# EAGLE board SRAMShield (EAGLE 7.5.0)
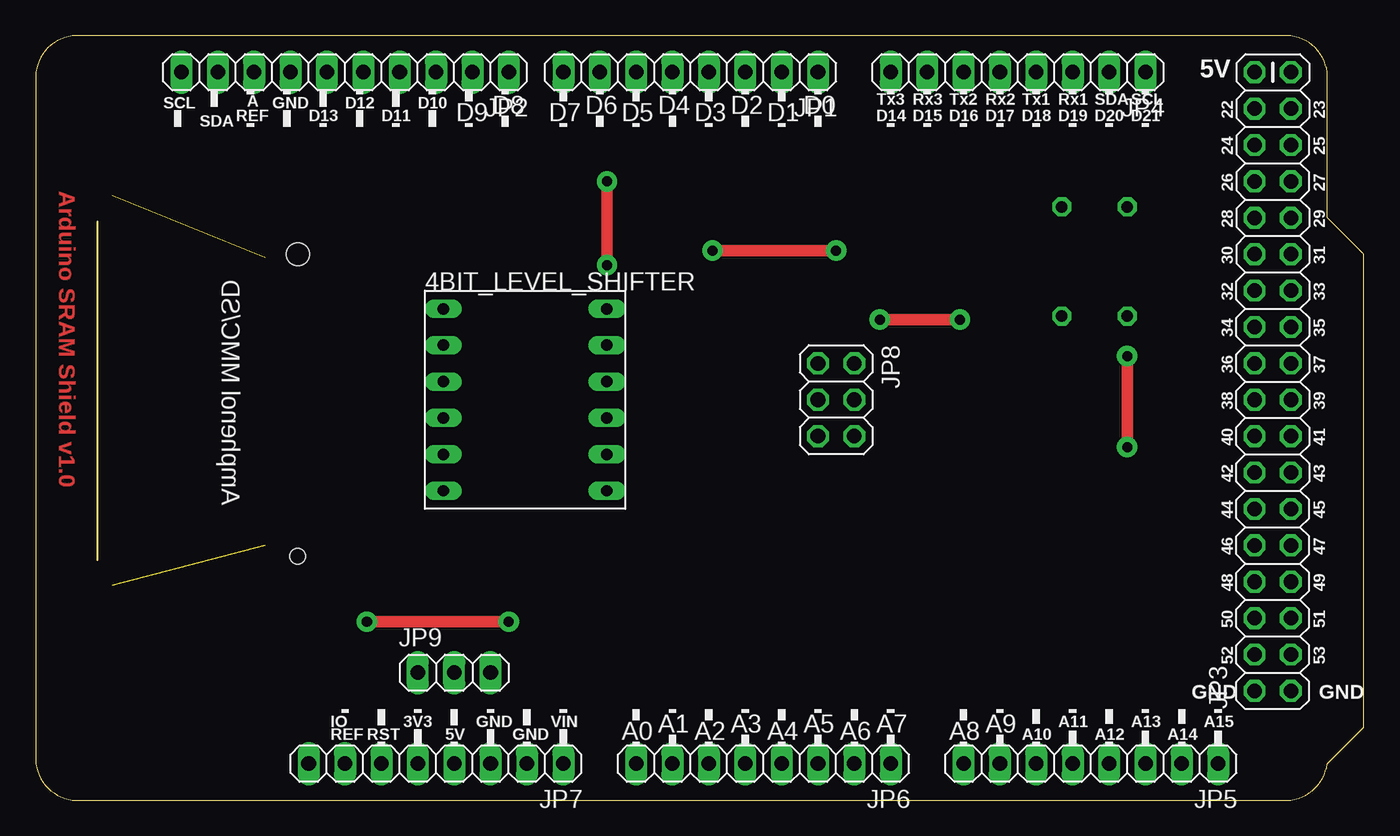
[diagram p0: board, top side]
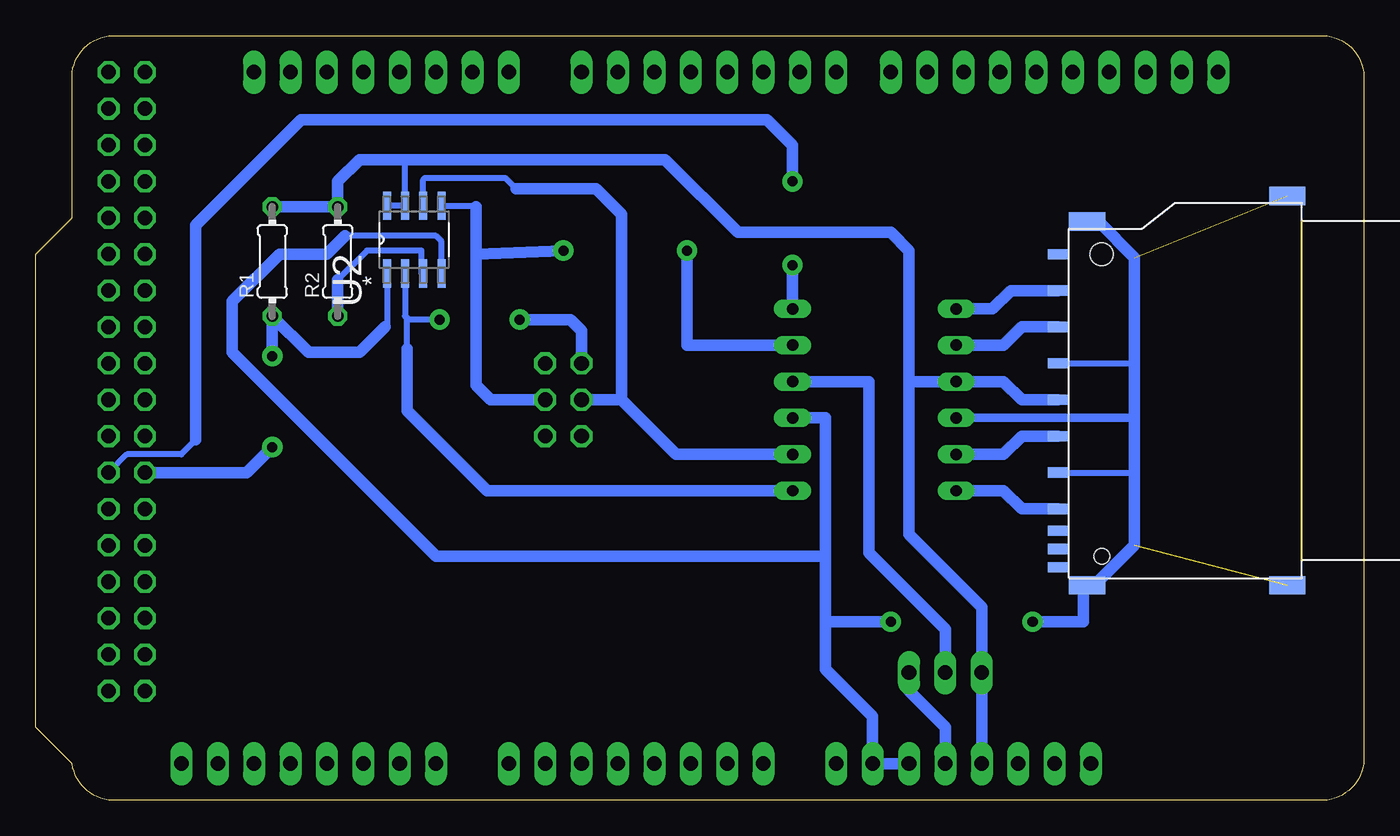
[diagram p1: board, bottom side, seen from below]

Size 92.71 x 53.34 mm. Coordinates in mm from the lower left corner, seen from the top.
Outline: 0,2.54 arc74 2.54,0 87.63,0 arc74 90.17,2.54 92.71,5.08 92.71,38.1 90.17,40.64 90.17,50.8 arc74 87.63,53.34 2.54,53.34 arc74 0,50.8 0,2.54
Copper layers (1*16): Top 0.035mm / dielectric 1.5mm / Bottom 0.035mm
Design rules "default *": minimum track width 10mil, minimum drill 24mil, track to track 12mil, track to pad 12mil, pad to pad 12mil, via to via 12mil, smd to smd 8mil, copper to edge 18mil, drill to drill 8mil, minimum pad ring 10mil, minimum via ring 8mil, stop-mask expansion 4mil, vias tented up to drill 0mil, thermal gap 10mil

## Footprints (pad centres in the part's own frame; a part is rotated, then mirrored left to right if it is on the bottom)
THT12 = drill 0.8 long: 1 -5.08,-1.27; 2 -5.08,-3.81; 3 -5.08,-6.35; 4 -5.08,-8.89; 5 -5.08,-11.43; 6 -5.08,-13.97; 7 6.35,-13.97; 8 6.35,-11.43; 9 6.35,-8.89; 10 6.35,-6.35; 11 6.35,-3.81; 12 6.35,-1.27
SDCMF-10915W010 = smd 0.711 x 1.422: 1 7.366,13.462; 2 4.826,13.462; 3 2.286,13.462; 4 -0.254,13.462; 5 -2.794,13.462; 6 -5.334,13.462; 7 -7.874,13.462; 8 -9.398,13.462; 9 9.906,13.462; 10 -11.938,13.462; 11 -10.668,13.462 | smd 1.27 x 2.54: M1 12.192,11.43; M2 13.97,-2.54; M3 -13.208,-2.54; M4 -13.208,11.43 | hole 1.6: 9.906,10.414 | hole 1.1: -11.176,10.414
1X08 = drill 1.016 long: 1 -8.89,0; 2 -6.35,0; 3 -3.81,0; 4 -1.27,0; 5 1.27,0; 6 3.81,0; 7 6.35,0; 8 8.89,0
1X10 = drill 1.016 long: 1 -11.43,0; 2 -8.89,0; 3 -6.35,0; 4 -3.81,0; 5 -1.27,0; 6 1.27,0; 7 3.81,0; 8 6.35,0; 9 8.89,0; 10 11.43,0
2X18 = drill 1.016 octagon: 1 -21.59,-1.27; 2 -21.59,1.27; 3 -19.05,-1.27; 4 -19.05,1.27; 5 -16.51,-1.27; 6 -16.51,1.27; 7 -13.97,-1.27; 8 -13.97,1.27; 9 -11.43,-1.27; 10 -11.43,1.27; 11 -8.89,-1.27; 12 -8.89,1.27; 13 -6.35,-1.27; 14 -6.35,1.27; 15 -3.81,-1.27; 16 -3.81,1.27; 17 -1.27,-1.27; 18 -1.27,1.27; 19 1.27,-1.27; 20 1.27,1.27; 21 3.81,-1.27; 22 3.81,1.27; 23 6.35,-1.27; 24 6.35,1.27; 25 8.89,-1.27; 26 8.89,1.27; 27 11.43,-1.27; 28 11.43,1.27; 29 13.97,-1.27; 30 13.97,1.27; 31 16.51,-1.27; 32 16.51,1.27; 33 19.05,-1.27; 34 19.05,1.27; 35 21.59,-1.27; 36 21.59,1.27
2X03 = drill 1.016 octagon: 1 -2.54,-1.27; 2 -2.54,1.27; 3 0,-1.27; 4 0,1.27; 5 2.54,-1.27; 6 2.54,1.27
1X03 = drill 1.016 long: 1 -2.54,0; 2 0,0; 3 2.54,0
0204/7 = drill 0.813 octagon: 1 -3.81,0; 2 3.81,0
SOIC127P600X175-8N = smd 1.981 x 0.559: 1 -2.362,1.905; 2 -2.362,0.635; 3 -2.362,-0.635; 4 -2.362,-1.905; 5 2.362,-1.905; 6 2.362,-0.635; 7 2.362,0.635; 8 2.362,1.905

## Placement (x,y rotation side)
4BIT_LEVEL_SHIFTER  4BIT_LEVEL_SHIFTER  [THT12]  33.53,35.56 0 top
J1  SD_SLOT  [SDCMF-10915W010]  7.87,28.19 90 bottom
JP1  Digital_0_7  [1X08]  45.72,50.8 180 top
JP2  Digital_8_13  [1X10]  21.59,50.8 180 top
JP3  Digital_22_53_5V_GND  [2X18]  86.36,29.21 90 top
JP4  Digital_14_21  [1X08]  68.58,50.8 180 top
JP5  Analog_8_15  [1X08]  73.66,2.54 180 top
JP6  Analog_0_8  [1X08]  50.8,2.54 180 top
JP7  POWER  [1X08]  27.94,2.54 180 top
JP8  ICSP  [2X03]  55.88,27.94 270 top
JP9  [1X03]  29.21,8.89 0 top
R1  10k  [0204/7]  76.2,37.59 90 bottom
R2  10k  [0204/7]  71.63,37.59 90 bottom
U2  23LC1024-I/SN  [SOIC127P600X175-8N]  66.29,39.12 90 bottom

## Library data of the parts
4BIT_LEVEL_SHIFTER = levelShifter
J1 = sd-mmc
JP1-JP9 = pinhead
R1 R2 = rcl
U2 = microchip_23LC1024; MPN: 23LC1024-I/SN; OC_FARNELL: 2212150; OC_NEWARK: 94T8231; PACKAGE: SOIC-8; SUPPLIER: MICROCHIP

## Nets
+3V3: 4BIT_LEVEL_SHIFTER.3 J1.4 JP7.5 JP9.1 R1.2 R2.2 U2.7 U2.8
+5V: JP7.4 JP9.3
GND: 4BIT_LEVEL_SHIFTER.4 4BIT_LEVEL_SHIFTER.9 J1.3 J1.6 J1.M1 J1.M2 J1.M3 J1.M4 JP7.2 JP7.3 U2.4
INPUT_LOGIC_VOLTAGE: 4BIT_LEVEL_SHIFTER.10 JP9.2
MISO_ARD: 4BIT_LEVEL_SHIFTER.7 JP8.1 U2.2
MOSI_ARD: 4BIT_LEVEL_SHIFTER.11 JP8.4 U2.5
N$2: 4BIT_LEVEL_SHIFTER.1 J1.1
N$4: 4BIT_LEVEL_SHIFTER.2 J1.2
N$5: 4BIT_LEVEL_SHIFTER.5 J1.5
N$6: 4BIT_LEVEL_SHIFTER.6 J1.7
N$9: R2.1 U2.3
SCK_ARD: 4BIT_LEVEL_SHIFTER.8 JP8.3 U2.6
SD_SS: 4BIT_LEVEL_SHIFTER.12 JP3.13
SRAM_SS: JP3.14 R1.1 U2.1

## Tracks (layer width: path | path; a pad name or v marks a point on that pad's centre or on a via)
+3V3
  Bottom 0.406: 67.06,44.7 66.93,44.58 U2.7 U2.8
  Bottom 0.813: J1.4 23.88,27.94 25.15,29.21 4BIT_LEVEL_SHIFTER.3 31.75,29.21 | R1.2 R2.2 71.63,43.18 70.1,44.7 67.06,44.7 48.77,44.7 43.69,39.62 33.02,39.62 31.75,38.35 31.75,29.21 | 31.75,29.21 31.75,18.54 26.67,13.46 JP9.1 JP7.5
+5V
  Bottom 0.813: JP9.3 31.75,7.62 29.21,5.08 JP7.4
GND  (via drill 0.7 pad 1.42)  (3 unrouted)
  Top 0.813: v23.11,12.45 v33.02,12.45
  Bottom 0.406: J1.3 16,30.48 | J1.6 16,22.86 | U2.4 64.39,38.99 64.77,39.37 71.12,39.37
  Bottom 0.61: 4BIT_LEVEL_SHIFTER.4 16,26.67
  Bottom 0.813: JP7.3 JP7.2 34.29,5.84 37.59,9.14 37.59,12.45 | 4BIT_LEVEL_SHIFTER.9 37.59,26.67 37.59,17.02 | 37.59,17.02 37.59,12.45 | v23.11,12.45 19.56,12.45 19.56,14.99 J1.M4 18.8,14.99 16,17.78 16,22.86 | v33.02,12.45 37.59,12.45 | 71.12,39.37 72.39,38.1 75.69,38.1 78.99,34.8 78.99,31.24 64.77,17.02 37.59,17.02 | J1.M1 18.54,40.39 16,37.85 16,30.48 16,26.67 | 16,22.86 16,26.67 | 16,26.67 16,22.86
INPUT_LOGIC_VOLTAGE
  Bottom 0.813: 4BIT_LEVEL_SHIFTER.10 34.54,29.21 34.54,17.27 29.21,11.94 JP9.2
MISO_ARD  (via drill 0.7 pad 1.42)
  Top 0.813: v58.93,33.53 v64.52,33.53
  Bottom 0.406: v64.52,33.53 66.67,33.53 66.8,33.66 | U2.2 66.93,33.78 66.8,33.66 | 66.8,31.5 66.8,33.66
  Bottom 0.813: JP8.1 54.61,32.77 55.37,33.53 v58.93,33.53 | 4BIT_LEVEL_SHIFTER.7 61.21,21.59 66.8,27.18 66.8,31.5
MOSI_ARD  (via drill 0.7 pad 1.42)
  Top 0.813: v47.24,38.35 v55.88,38.35
  Bottom 0.406: U2.5 62.05,41.48 61.98,41.4
  Bottom 0.813: 61.98,41.4 61.98,38.1 | 61.98,38.1 61.98,28.96 60.96,27.94 JP8.4 | 4BIT_LEVEL_SHIFTER.11 47.24,31.75 v47.24,38.35 | v55.88,38.35 61.98,38.1
N$2
  Bottom 0.813: J1.1 24.64,35.56 25.91,34.29 4BIT_LEVEL_SHIFTER.1
N$4
  Bottom 0.813: J1.2 23.88,33.02 25.15,31.75 4BIT_LEVEL_SHIFTER.2
N$5
  Bottom 0.813: J1.5 23.88,25.4 25.15,24.13 4BIT_LEVEL_SHIFTER.5
N$6
  Bottom 0.813: 4BIT_LEVEL_SHIFTER.6 25.15,21.59 23.88,20.32 J1.7
N$9
  Bottom 0.406: U2.3 65.79,36.75 65.79,38.35 69.6,38.35 71.63,36.32
  Bottom 0.813: 71.63,36.32 R2.1
SCK_ARD
  Bottom 0.406: U2.6 65.66,43.31 65.53,43.43 59.94,43.43 59.18,42.67
  Bottom 0.813: 4BIT_LEVEL_SHIFTER.8 48.01,24.13 51.82,27.94 | JP8.3 51.82,27.94 | 59.18,42.67 53.59,42.67 51.82,40.89 51.82,27.94
SD_SS  (via drill 0.7 pad 1.42)
  Top 0.813: v39.88,37.34 v39.88,43.18
  Bottom 0.406: 81.53,25.15 82.55,24.13 86.36,24.13 JP3.13
  Bottom 0.813: 4BIT_LEVEL_SHIFTER.12 v39.88,37.34 | v39.88,43.18 39.88,45.72 41.66,47.5 74.17,47.5 81.53,40.13 81.53,25.15
SRAM_SS  (via drill 0.7 pad 1.42)
  Top 0.813: v76.2,30.99 v76.2,24.64
  Bottom 0.406: U2.1 68.2,33.15 68.33,33.02
  Bottom 0.813: 68.33,33.02 70.1,31.24 73.66,31.24 R1.1 v76.2,30.99 | v76.2,24.64 77.98,22.86 JP3.14

## Text on the board
Top: Arduino SRAM Shield v1.0
tPlace: 5V | Tx3 | Rx3 | Tx2 | Rx2 | Tx1 | Rx1 | SDA | SCL | SCL | A | GND | D12 | D10 | D8 | D6 | D4 | D2 | D0 | 22 | 23 | SDA | REF | D13 | D11 | D9 | D7 | D5 | D3 | D1 | D14 | D15 | D16 | D17 | D18 | D19 | D20 | D21 | 24 | 25 | 26 | 27 | 28 | 29 | 30 | 31 | 32 | 33 | 34 | 35 | 36 | 37 | 38 | 39 | 40 | 41 | 42 | 43 | 44 | 45 | 46 | 47 | 48 | 49 | 50 | 51 | 52 | 53 | GND | GND | IO | 3V3 | GND | VIN | A1 | A3 | A5 | A7 | A9 | A11 | A13 | A15 | REF | RST | 5V | GND | A0 | A2 | A4 | A6 | A8 | A10 | A12 | A14